# Altium PCB 滴液.PcbDoc
Units mil, origin at the board's own origin, x right, y up, seen from the top; angles counter-clockwise.
Board outline 2952.76 x 2559.06 mil, 2 copper layers (Top Layer, Bottom Layer); 19 components, 18 nets, 109 pads, 6 vias.
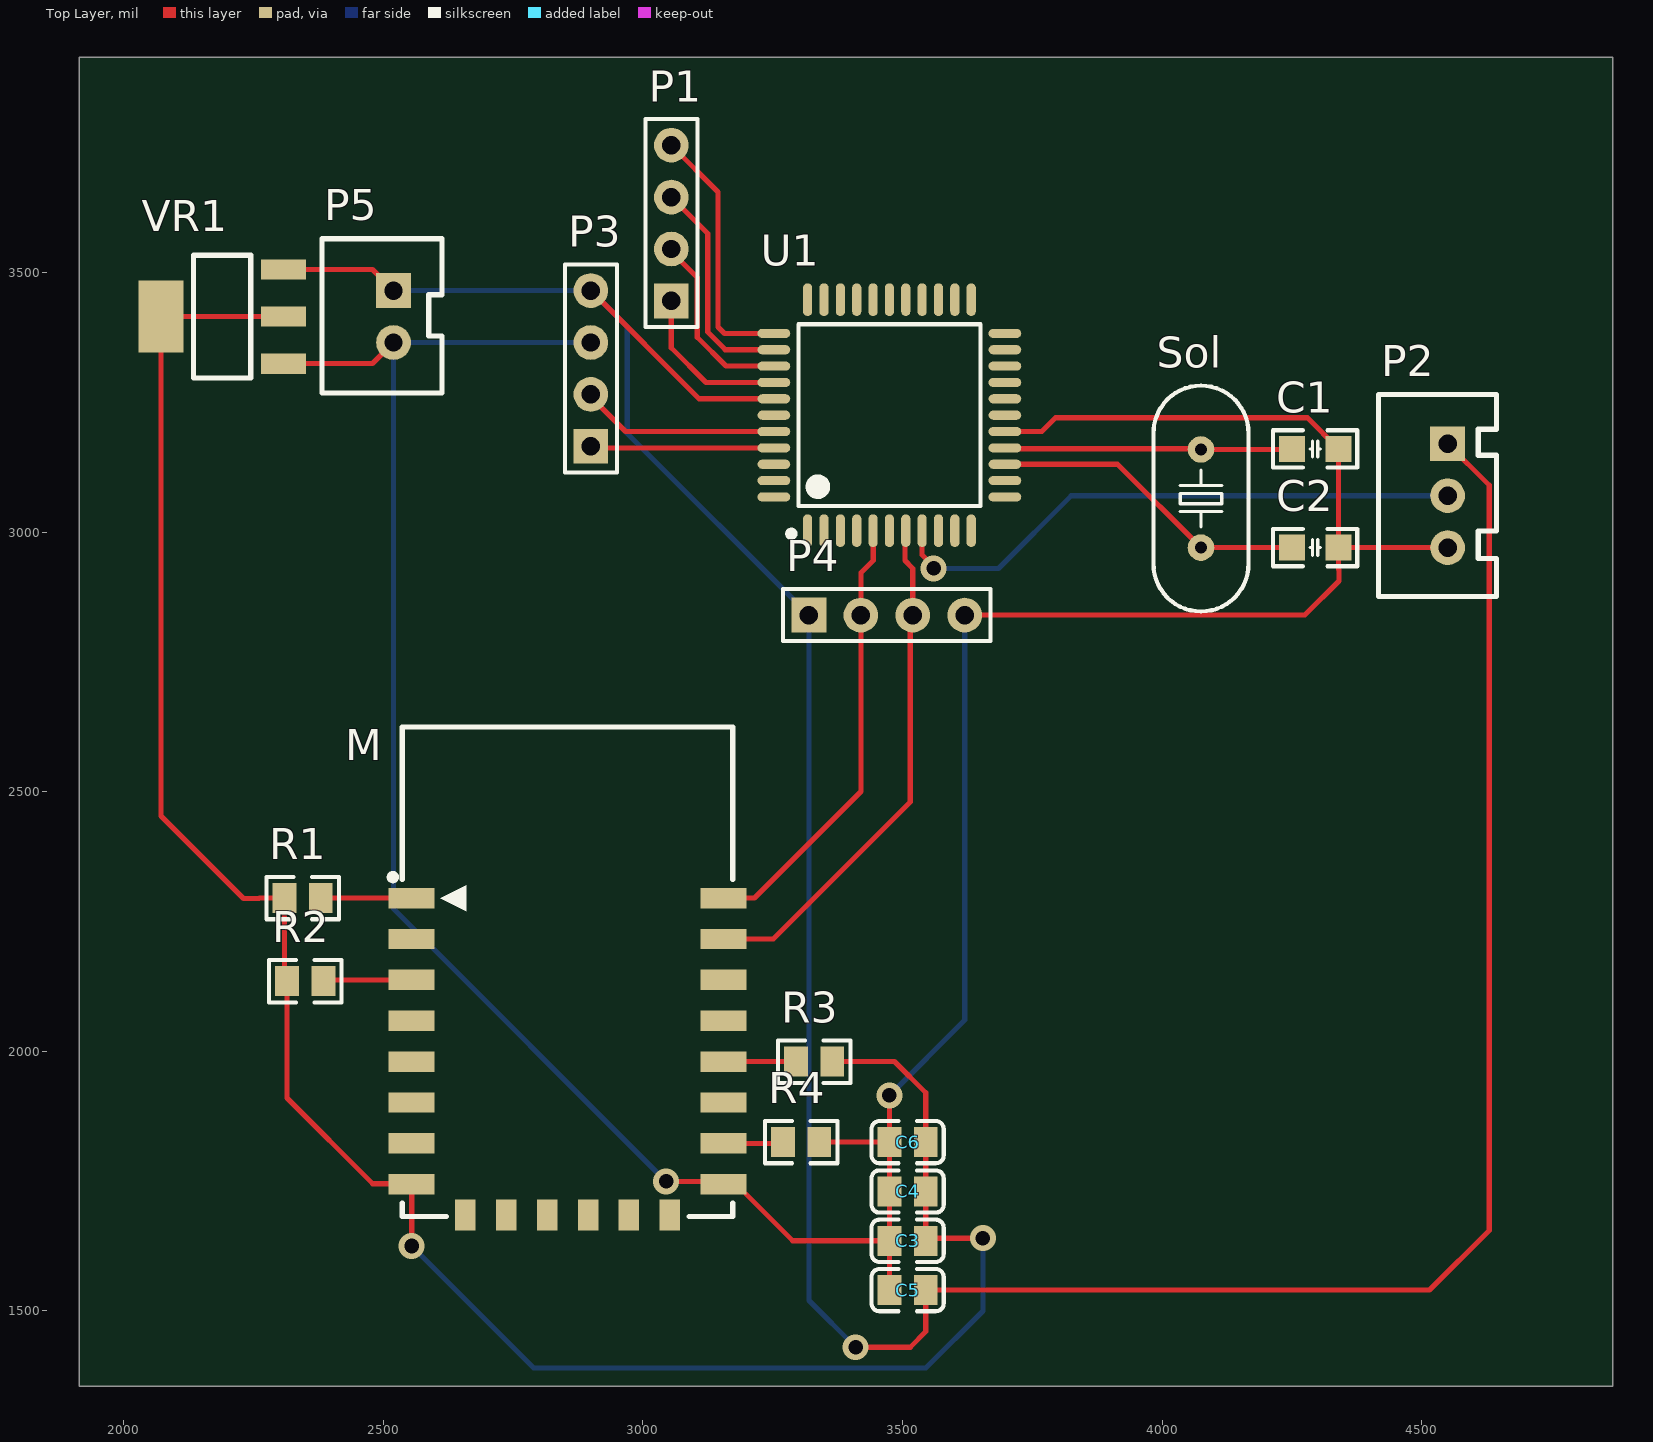
[diagram p0: Top Layer view]
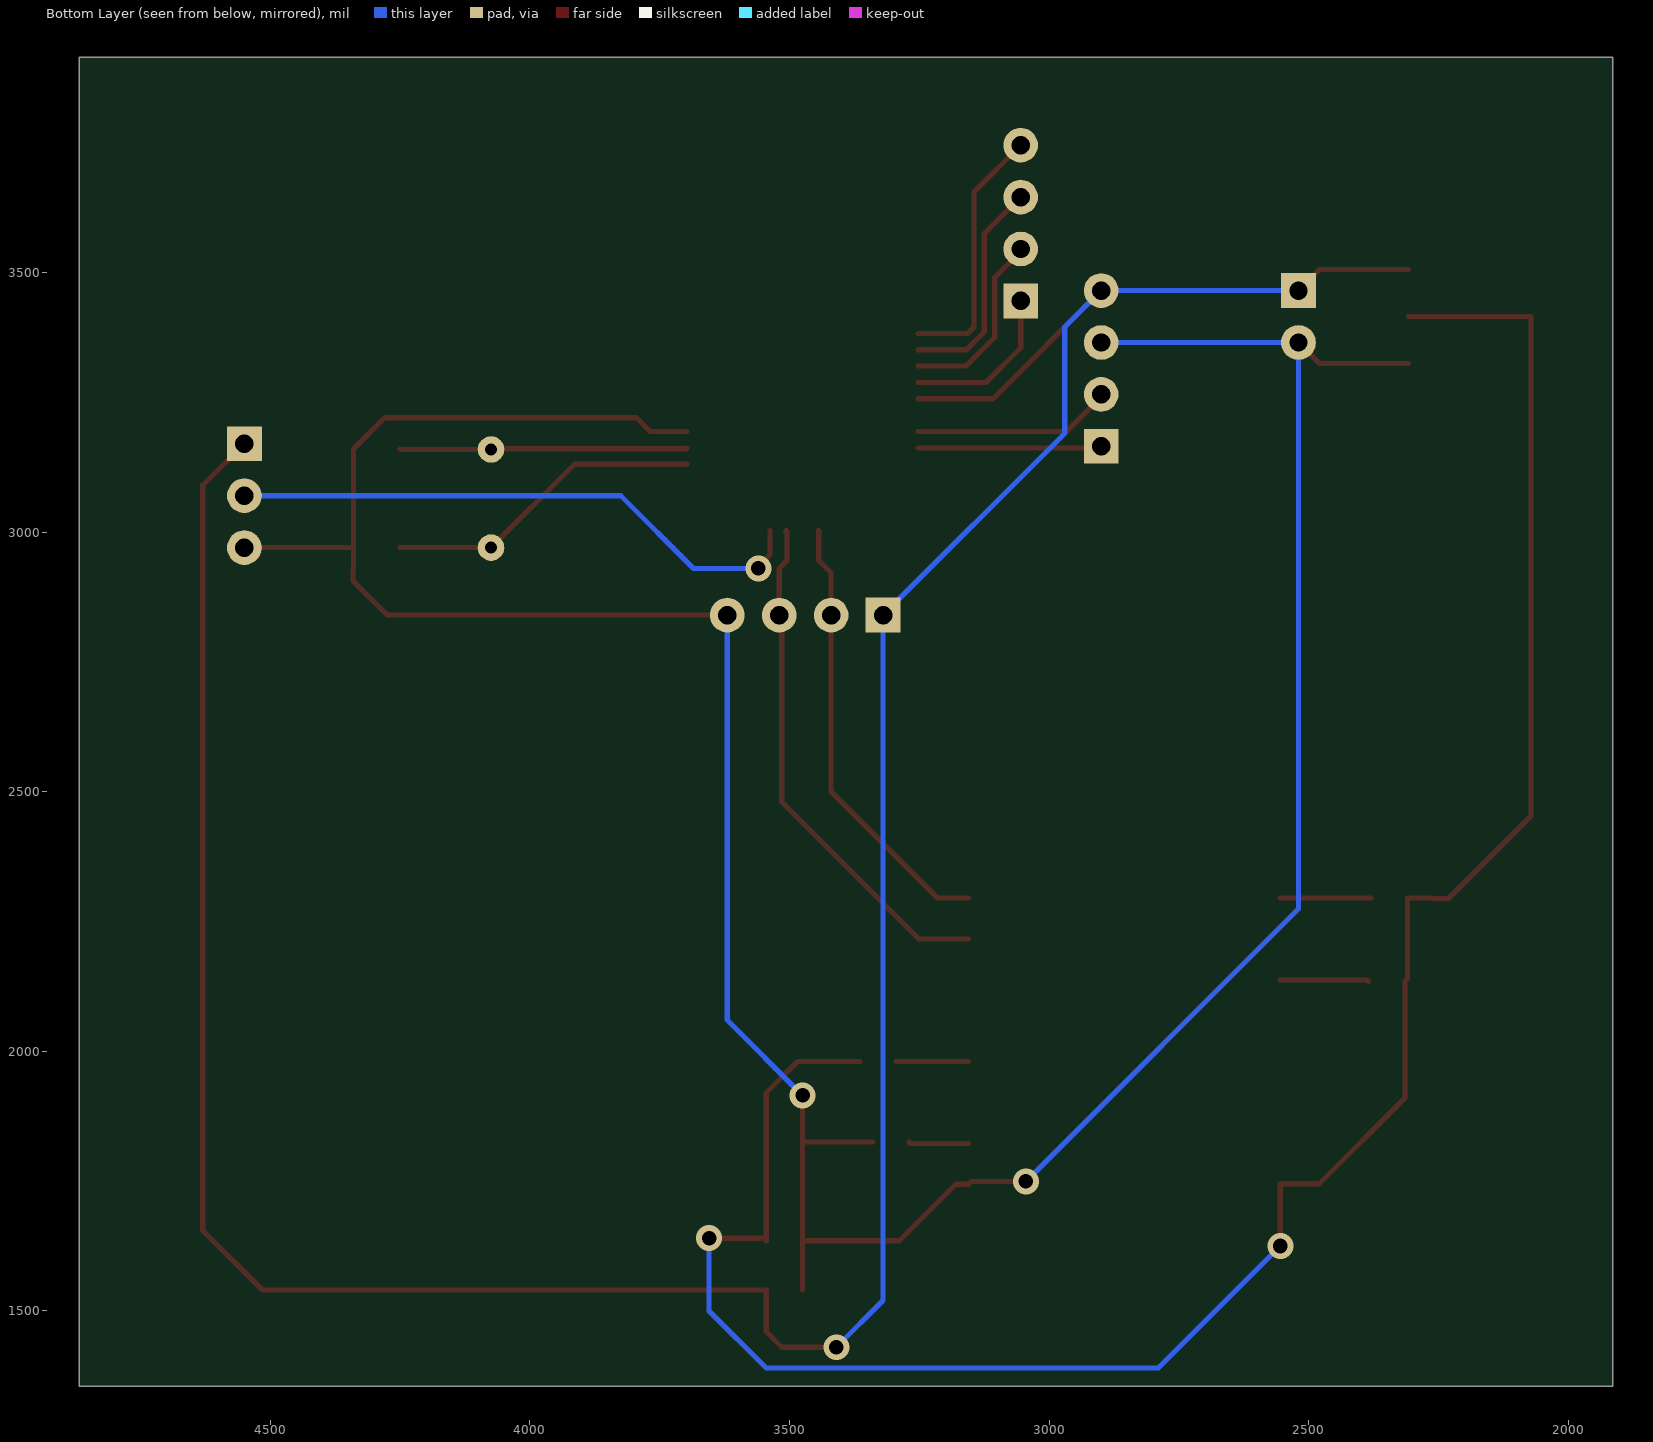
[diagram p1: Bottom Layer view, seen from below]

## Layer stack, top to bottom
Top Solder: solder mask 0.4, Solder Resist, Dk 3.5
Top Layer: signal copper 1.4
Dielectric 1: dielectric 12.6, FR-4, Dk 4.8
Bottom Layer: signal copper 1.4
Bottom Solder: solder mask 0.4, Solder Resist, Dk 3.5

## Board outline
1915,1355 1915,3914.06 4867.76,3914.06 4867.76,1355

## Design rules (kind name [scope] priority, off if disabled: settings)
Clearance [All] p1: gap=10 ignorepadtopadclearanceinfootprint=FALSE except(0: Arc-Hole Track-Hole SMDPad-Hole THPad-Hole Via-Hole Fill-Hole Poly-Hole Region-Hole Text-Hole)
PolygonConnect [All] p1: connectstyle=Relief reliefconductorwidth=10 reliefentries=4 polygonreliefangle="90 Angle" airgapwidth=10
RoutingVias [All] p1: holewidth=28 width=50 viastyle="Through Hole" minholewidth=28 minwidth=50 maxholewidth=28 maxwidth=50
SolderMaskExpansion [All] p1: expansion=4 istentingtop=FALSE
Width [All] p1: maxlimit=10 minlimit=10 preferedwidth=10
30 further rules are at their usual default settings.

## Components (designator, comment, footprint, x,y, rotation, side; value= is the part's Value field where it differs from the comment)
C1 "33pf" "C 0805_M" 4295,3160 r180 top
C2 "33pf" "C 0805_M" 4295,2970 r180 top
C3 "100nF" 0805_C 3510,1635 r0 top
C4 "10uF" 0805_C 3510,1730 r0 top
C5 "22uF" 0805_C 3510,1540 r0 top
C6 "10uF" 0805_C 3510,1825 r0 top
M "esp12f" ESP_12E 2540.24,2295 r0 top
P1 "UND" HDR2.54-LI-4P 3055,3595 r90 top
P2 "INFRARED TUBE2" XH2.54-LI-3P 4550,3070 r270 top
P3 "LCD" HDR2.54-M-LI-4P 2900,3315 r90 top
P4 "4PIN" HDR2.54-LI-4P 3470,2840 r0 top
P5 "INFRARED TUBE1" XH2.54-LI-2P 2520,3415 r270 top
R1 "10KΩ" 0805_R 2344.96,2295 r0 top
R2 "10KΩ" 0805_R 2350,2135 r0 top
R3 "10KΩ" 0805_R 3330,1980 r0 top
R4 "10KΩ" 0805_R 3305,1825 r0 top
Sol "CrystalOscillator" "OSC HC-49S" 4075,3064.49 r90 top
U1 "STC12C5A60S2-35I" LQFP-44_10x10x08P 3475,3225 r0 top
VR1 "AMS1117-3.3" SOT-223 2190,3415 r0 top

## Footprints (in the part's own frame and the unit in brackets; to place one, negate y for a bottom-side part, rotate by r counter-clockwise, add the part's x,y. Pads: shape width x height; smd on the part's side, far side on the other; paste and mask are expansions set on the pad)
0805_C [mm]
  rect 1.16x1.47 smd: 1(-0.89,0) 2(0.89,0)
  silkscreen extent -1.77,-1.04 1.77,1.04, body extent -1,-0.62 1,0.63, height 0.77
0805_R [mm]
  rect 1.16x1.47 smd: 1(-0.89,0) 2(0.89,0)
  silkscreen extent -1.77,-1.04 1.77,1.03, body extent -1,-0.62 1,0.63, height 0.49
"C 0805_M" [mil] "无极性贴片电容"
  rect 50x50 smd: 1(-45,0) 2(45,0)
  silkscreen extent -81,-36 81,36, body extent -39,-24 39,24, height 20
ESP_12E [mm] "ESP-12 Wi-Fi Module by AI-Thinker"
  rect 2.25x1 smd: 1(0.375,0) 2(0.375,-2) 3(0.375,-4) 4(0.375,-6) 5(0.375,-8) 6(0.375,-10) 7(0.375,-12) 8(0.375,-14) 15(15.625,-14) 16(15.625,-12) 17(15.625,-10) 18(15.625,-8) 19(15.625,-6) 20(15.625,-4) 21(15.625,-2) 22(15.625,0)
  rect 1x1.5 smd: 9(3,-15.5) 10(5,-15.5) 11(7,-15.5) 12(9,-15.5) 13(11,-15.5) 14(13,-15.5)
  silkscreen extent -0.7,-15.57 16.08,8.37, body extent 0,-15.49 16,8.51, height 2.75
HDR2.54-LI-4P [mm] "排针，4脚"
  rect 1.7x1.7 hole 0.9: 1(-3.81,0)
  round 1.7 hole 0.9: 2(-1.27,0) 3(1.27,0) 4(3.81,0)
  silkscreen extent -5.08,-1.27 5.08,1.27, body extent -5.08,-1.27 5.08,1.27, height 8.5
HDR2.54-M-LI-4P [mm] "排母，4脚"
  rect 1.7x1.7 hole 0.9: 1(-3.81,0)
  round 1.7 hole 0.9: 2(-1.27,0) 3(1.27,0) 4(3.81,0)
  silkscreen extent -5.08,-1.27 5.08,1.27, body extent -5.08,-1.27 5.08,1.27, height 8.5
LQFP-44_10x10x08P [mm]
  oval 0.45x1.6 smd: 1(-4,-5.65) 2(-3.2,-5.65) 3(-2.4,-5.65) 4(-1.6,-5.65) 5(-0.8,-5.65) 6(0,-5.65) 7(0.8,-5.65) 8(1.6,-5.65) 9(2.4,-5.65) 10(3.2,-5.65) 11(4,-5.65) 23(4,5.65) 24(3.2,5.65) 25(2.4,5.65) 26(1.6,5.65) 27(0.8,5.65) 28(0,5.65) 29(-0.8,5.65) 30(-1.6,5.65) 31(-2.4,5.65) 32(-3.2,5.65) 33(-4,5.65)
  oval 1.6x0.45 smd: 12(5.65,-4) 13(5.65,-3.2) 14(5.65,-2.4) 15(5.65,-1.6) 16(5.65,-0.8) 17(5.65,0) 18(5.65,0.8) 19(5.65,1.6) 20(5.65,2.4) 21(5.65,3.2) 22(5.65,4) 34(-5.65,4) 35(-5.65,3.2) 36(-5.65,2.4) 37(-5.65,1.6) 38(-5.65,0.8) 39(-5.65,0) 40(-5.65,-0.8) 41(-5.65,-1.6) 42(-5.65,-2.4) 43(-5.65,-3.2) 44(-5.65,-4)
  silkscreen extent -4.95,-5.95 4.45,4.45
"OSC HC-49S" [mm]
  round 1.3 hole 0.6: 1(-2.4,0) 2(2.4,0)
  silkscreen extent -5.52,-2.32 5.52,2.33, body extent -5.52,-2.32 5.53,2.33, height 4.13
SOT-223 [mm]
  rect 2.2x1 smd: 1(3,-2.3) 2(3,0) 3(3,2.3)
  rect 2.2x3.5 smd: 2(-3,0)
  silkscreen extent -1.4,-3 1.4,3, body extent -3.49,-3.24 3.49,3.24, height 1.64
XH2.54-LI-2P [mm] "接插件，2P"
  rect 1.7x1.7 hole 0.9: 1(-1.27,0)
  round 1.7 hole 0.9: 2(1.27,0)
  silkscreen extent -3.81,-3.51 3.74,2.37, body extent -3.77,-3.3 3.77,2.4, height 7.05
XH2.54-LI-3P [mm] "接插件，3P"
  rect 1.7x1.7 hole 0.9: 1(-2.54,0)
  round 1.7 hole 0.9: 2(0,0) 3(2.54,0)
  silkscreen extent -4.95,-3.38 4.93,2.39, body extent -5.04,-3.3 5.04,2.4, height 7.03

## Part data
C1 C2: library part 电容, "电容"
C3 C5 C6: library part "0805 100nF(104) 10% 50V", "贴片电容", Package=0805, SuppliersPartNumber=C49678, ComponentLink1Description=供应商链接, ComponentLink1URL=http://www.szlcsc.com/product/details_50686.html, Supplier=LC
C4: library part "0805 10uF (106) 10% 25V", "贴片电容", Package=0805, SuppliersPartNumber=C15850, ComponentLink1Description=供应商链接, ComponentLink1URL=http://www.szlcsc.com/product/details_16532.html, Supplier=LC
P1: library part "4PIN UND"
P2: library part "INFRARED TUBE 2"
P3: library part lcd
R1 R2 R3 R4: library part "0805 10KΩ (1002) 1%", "贴片电阻", Package=0805, SuppliersPartNumber=C17414, ComponentLink1Description=供应商链接, ComponentLink1URL=http://www.szlcsc.com/product/details_18102.html, Supplier=LC
Sol: library part XTAL, "晶振"
U1: "MCU", Package=LQFP-44_10x10x08P, SuppliersPartNumber=C8696, ComponentLink1Description=供应商链接, ComponentLink1URL=http://www.szlcsc.com/product/details_9202.html, Supplier=LC
VR1: library part "SOT-223 AMS1117-3.3", "低压差线性稳压(LDO)", Package=SOT-223, SuppliersPartNumber=C6186, ComponentLink1Description=供应商链接, ComponentLink1URL=http://www.szlcsc.com/product/details_6652.html, Supplier=LC

## Via types
v1: diameter 50, hole 28, Top Layer to Bottom Layer, 6 vias

## Nets (pads, with @x,y where several pads share a name; then routed paths per layer and width w, separated by ;. In a path a pad name is that pad's centre, name@x,y a point inside that pad or via, vN(x,y) a via of type N, cw(c..) or ccw(c..) an arc to the next point about the centre after c; other vN are vias at no path point)
3.3V: C3.2 C4.2 C6.2 M.8 R1.1 R2.1 R3.2 VR1.2 | length 4301.9
  Top Layer w10: VR1.2@2308.11,3415 2071.89,3415 2071.89,2453.11 2230.86,2294.14 2261.04,2294.14 2261.9,2295 R1.1 2309.92,2140.04 R2.1 2314.96,1910.04 2480,1745 2553.82,1745 M.8 v1(2555,1625) ; R3.2 3485,1980 3545.04,1919.96 C4.2 C3.2 3550.04,1640 v1(3655,1640)
  Bottom Layer w10: v1(2555,1625) 2790,1390 3545,1390 3655,1500 v1(3655,1640)
GND: C1.1 C2.1 C3.1 C4.1 C5.1 C6.1 M.15 P2.3 P3.3 P4.4 P5.2 R4.2 U1.16 VR1.1 | length 6305.2
  Top Layer w10: VR1.1 2479.45,3324.45 P5.2 ; v1(3045,1749.29) 3149.92,1749.29 M.15 3180,1743.82 3288.82,1635 C3.1 ; R4.2 C6.1 ; C5.1 C3.1 ; v1(3475,1915) C6.1 C6.1 ; P4.4 4275,2840 4340.86,2905.86 4340.86,2927.5 4340,2928.36 C2.1 ; U1.16 3768.5,3193.5 3795,3220 4280,3220 C1.1 C2.1 ; P2.3 C2.1 ; C3.1 C4.1 C6.1
  Bottom Layer w10: P3.3 P5.2 2520,2274.29 v1(3045,1749.29) ; v1(3475,1915) 3620,2060 P4.4
NetC1_2: C1.2 Sol.2 U1.15 | length 554.2
  Top Layer w10: U1.15 3698.92,3160.53 4073.45,3160.53 Sol.2 4248.98,3158.98 C1.2
NetC2_2: C2.2 Sol.1 U1.14 | length 619
  Top Layer w10: U1.14 3914.49,3130.51 Sol.1 C2.2
NetM_1: M.1 R1.2 | length 175
  Top Layer w10: R1.2 M.1
NetM_3: M.3 R2.2 | length 171
  Top Layer w10: R2.2 2387.56,2137.52 M.3
NetM_16: M.16 R4.1 | length 115.6
  Top Layer w10: M.16 3267.52,1822.56 R4.1
NetM_18: M.18 R3.1 | length 139.6
  Top Layer w10: M.18 3294.92,1980.04 R3.1
NetP1_1: P1.1 U1.37 | length 315.3
  Top Layer w10: P1.1 3055,3355 3122.01,3287.99 U1.37
NetP1_2: P1.2 U1.36 | length 361.3
  Top Layer w10: P1.2 3055,3540 3105,3490 3105,3375 3160,3320 3252.05,3320 U1.36
NetP1_3: P1.3 U1.35 | length 430.6
  Top Layer w10: P1.3 3125,3575 3125,3385 3159.02,3350.98 U1.35
NetP1_4: P1.4 U1.34 | length 500
  Top Layer w10: P1.4 3145,3655 3145,3395 3157.52,3382.48 U1.34
NetP2_2: P2.2 U1.8 | length 1129.7
  Top Layer w10: U1.8 3537.99,2956.06 3560,2934.06 v1(3560,2930)
  Bottom Layer w10: v1(3560,2930) 3685,2930 3825,3070 P2.2
RXD: M.22 P4.2 U1.5 | length 862
  Top Layer w10: M.22 3215,2295 3420,2500 P4.2 3420,2921.56 3443.7,2945.26 3443.7,3002.36 U1.5
scl: P3.1 U1.41 | length 353.8
  Top Layer w10: P3.1 2902.99,3162.01 U1.41
sda: P3.2 U1.40 | length 385.1
  Top Layer w10: P3.2 2900,3260 2966.5,3193.5 U1.40
TXD: M.21 P4.3 U1.7 | length 1002.4
  Top Layer w10: M.21 3251.26,2216.26 3515,2480 3515,2835 P4.3 3520,2930 3505,2945 3505,2956.34 3505.02,3001.08 U1.7 U1.7@3507.97,3001.08
VCC: C5.2 P2.1 P3.4 P4.1 P5.1 U1.38 VR1.3 | length 6202
  Top Layer w10: VR1.3 2479.45,3505.55 P5.1 ; P3.4 3108.5,3256.5 U1.38 ; v1(3410,1430) 3515,1430 3545.04,1460.04 C5.2 4515,1540 4630,1655 4630,3090 P2.1
  Bottom Layer w10: P5.1 P3.4 2970,3395 2970,3190 P4.1 3320,1520 v1(3410,1430)
pads on no net: M.2 M.4 M.5 M.6 M.7 M.9 M.10 M.11 M.12 M.13 M.14 M.17 M.19 M.20 U1.1 U1.2 U1.3 U1.4 U1.6 U1.9 U1.10 U1.11 U1.12 U1.13 U1.17 U1.18 U1.19 U1.20 U1.21 U1.22 U1.23 U1.24 U1.25 U1.26 U1.27 U1.28 U1.29 U1.30 U1.31 U1.32 U1.33 U1.39 U1.42 U1.43 U1.44

## Silkscreen, mask and mechanical layers (free items; w line width, h text height)
Mechanical 1:
  the board outline again, w10.08

## Text inside footprints (layer, text, board x,y; h text height)
M: Mechanical 13 "ANTENNA AREA" at 2545.24,2605 h10; Mechanical 13 "CUTOUT POLYGON" at 2545.24,2585 h10